# EAGLE board Analog_Master (EAGLE 7.4.0)
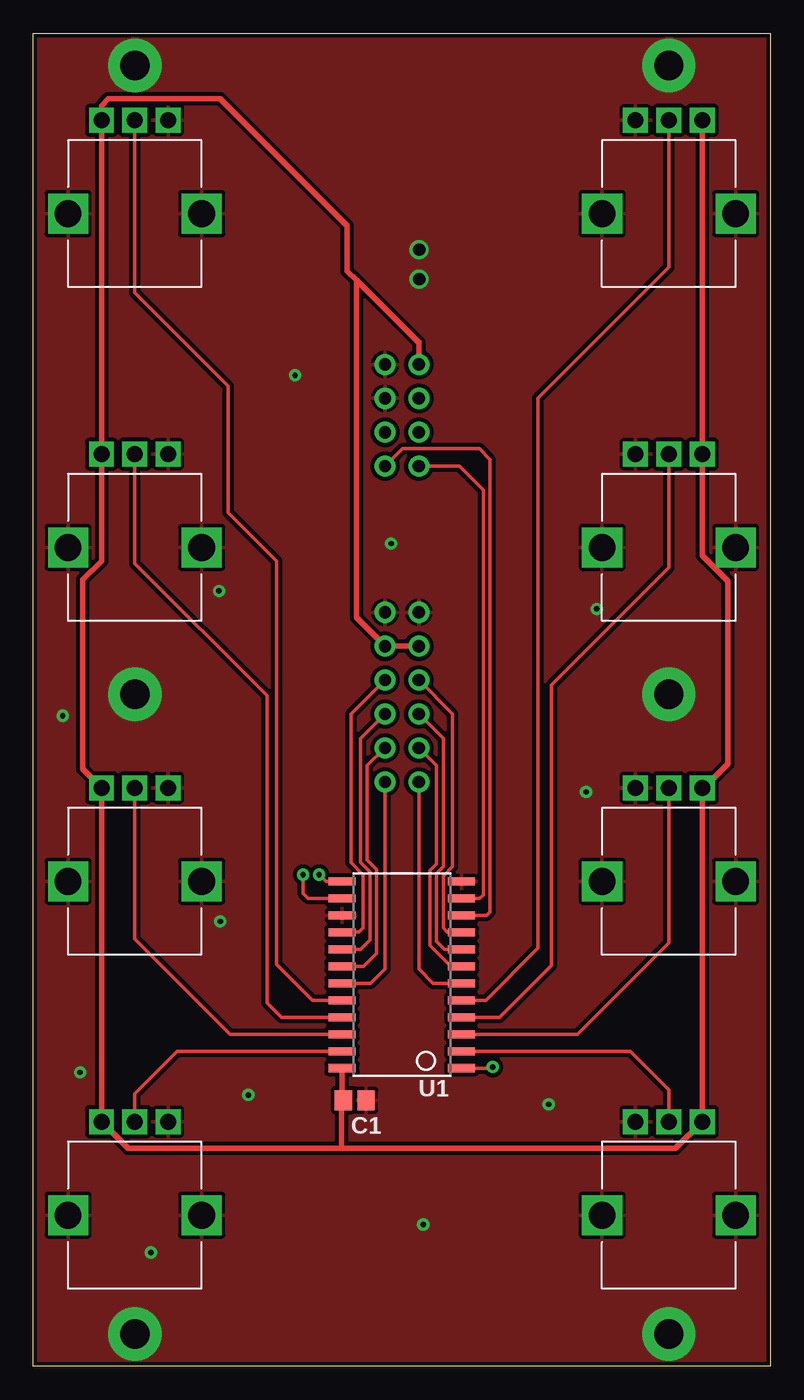
[diagram p0: board, top side]
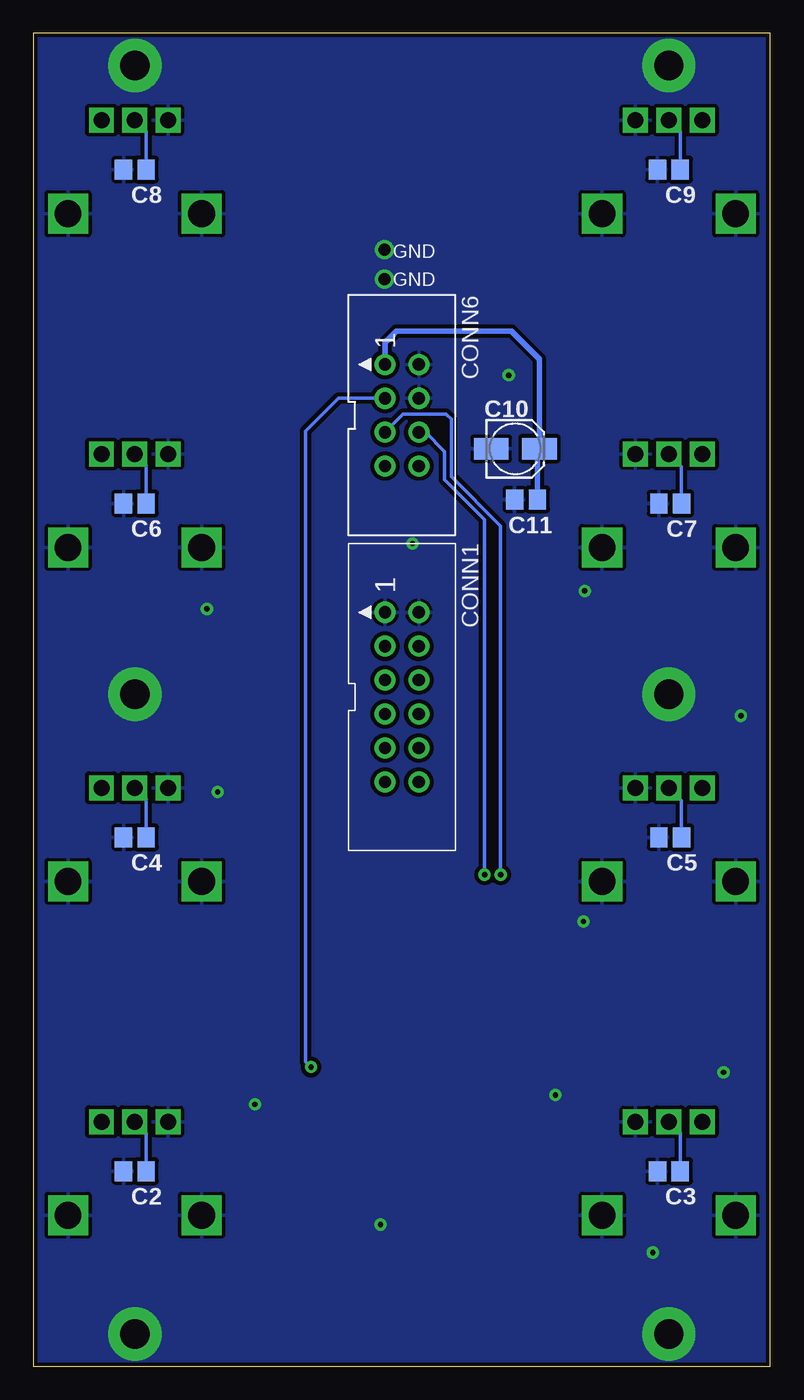
[diagram p1: board, bottom side, seen from below]

Size 55.2 x 99.8 mm. Coordinates in mm from the lower left corner, seen from the top.
Outline: 55.2,0 0,0 0,99.8 55.2,99.8 55.2,0
Copper layers (1*16): Top 0.035mm / dielectric 1.5mm / Bottom 0.035mm
Design rules "smiery": minimum track width 10mil, minimum drill 12mil, track to track 7mil, track to pad 5mil, pad to pad 5mil, via to via 6mil, smd to smd 0mil, copper to edge 12mil, drill to drill 10mil, minimum pad ring 13mil, minimum via ring 10mil, stop-mask expansion 2mil, vias tented up to drill 25mil, thermal gap 10mil

## Footprints (pad centres in the part's own frame; a part is rotated, then mirrored left to right if it is on the bottom)
C0805 = smd 1.3 x 1.5: 1 -0.85,0; 2 0.85,0
153CLV-0405 = smd 2.6 x 1.6: + 1.8,0; - -1.8,0
IDC-12P-2.54 = drill 0.914: 1 -6.35,-1.27; 2 -6.35,1.27; 3 -3.81,-1.27; 4 -3.81,1.27; 5 -1.27,-1.27; 6 -1.27,1.27; 7 1.27,-1.27; 8 1.27,1.27; 9 3.81,-1.27; 10 3.81,1.27; 11 6.35,-1.27; 12 6.35,1.27
IDC-08P-2.54 = drill 0.914: 1 -3.81,-1.27; 2 -3.81,1.27; 3 -1.27,-1.27; 4 -1.27,1.27; 5 1.27,-1.27; 6 1.27,1.27; 7 3.81,-1.27; 8 3.81,1.27
PTV09A-4025F-B103 = drill 1.2 square: 1 -2.5,-7; 2 0,-7; 3 2.5,-7 | drill 2 square: S1 -5,0; S2 5,0
SO24-W = smd 2.032 x 0.6: 1 -4.475,6.985; 2 -4.475,5.715; 3 -4.475,4.445; 4 -4.475,3.175; 5 -4.475,1.905; 6 -4.475,0.635; 7 -4.475,-0.635; 8 -4.475,-1.905; 9 -4.475,-3.175; 10 -4.475,-4.445; 11 -4.475,-5.715; 12 -4.475,-6.985; 13 4.475,-6.985; 14 4.475,-5.715; 15 4.475,-4.445; 16 4.475,-3.175; 17 4.475,-1.905; 18 4.475,-0.635; 19 4.475,0.635; 20 4.475,1.905; 21 4.475,3.175; 22 4.475,4.445; 23 4.475,5.715; 24 4.475,6.985

## Placement (x,y rotation side)
C1  100n  [C0805]  24.07,19.91 180 top
C2  100n  [C0805]  47.6,14.6 180 bottom
C3  100n  [C0805]  7.6,14.6 180 bottom
C4  100n  [C0805]  47.6,39.6 180 bottom
C5  100n  [C0805]  7.5,39.6 180 bottom
C6  100n  [C0805]  47.6,64.6 180 bottom
C7  100n  [C0805]  7.5,64.6 180 bottom
C8  100n  [C0805]  47.6,89.6 180 bottom
C9  100n  [C0805]  7.6,89.6 180 bottom
C10  10u  [153CLV-0405]  19.1,68.7 0 bottom
C11  100n  [C0805]  18.3,64.9 180 bottom
CONN1  PINHD-2X06-IDC-2.54-V  [IDC-12P-2.54]  27.6,50.1 270 bottom
CONN6  PINHD-2X04-IDC-2.54-V  [IDC-08P-2.54]  27.6,71.2 270 bottom
R3  10k  [PTV09A-4025F-B103]  47.6,11.3 180 top
R4  10k  [PTV09A-4025F-B103]  7.6,11.3 180 top
R5  10k  [PTV09A-4025F-B103]  47.6,36.3 180 top
R6  10k  [PTV09A-4025F-B103]  7.6,36.3 180 top
R7  10k  [PTV09A-4025F-B103]  47.6,61.3 180 top
R8  10k  [PTV09A-4025F-B103]  7.6,61.3 180 top
R9  10k  [PTV09A-4025F-B103]  47.6,86.3 180 top
R10  10k  [PTV09A-4025F-B103]  7.6,86.3 180 top
U1  MC14067BDWR2G-SO24W  [SO24-W]  27.6,29.3 180 top

## Library data of the parts
C1-C9 C11 CONN1 CONN6 R3-R10 = igor_lbr
C10 = igor_lbr; MANUFACTURER: Multicomp; MPN: MCVVT016M100CA1L
U1 = igor_lbr; MANUFACTURER: ON Semiconductor; MPN: MC14067BDWR2G

## Nets
+3V3: C1.2 C10.+ C11.1 CONN1.3 CONN1.4 CONN6.1 R3.1 R4.3 R5.1 R6.3 R7.1 R8.3 R9.1 R10.3 U1.24
AS_1: C2.1 R3.2 U1.2
AS_2: C3.1 R4.2 U1.23
AS_3: C4.1 R5.2 U1.3
AS_4: C5.1 R6.2 U1.22
AS_5: C6.1 R7.2 U1.4
AS_6: C7.1 R8.2 U1.21
AS_7: C8.1 R9.2 U1.5
AS_8: C9.1 R10.2 U1.20
AS_9: CONN1.5 U1.9
AS_10: CONN1.7 U1.8
AS_11: CONN1.9 U1.7
AS_12: CONN1.11 U1.6
AS_13: CONN1.6 U1.16
AS_14: CONN1.8 U1.17
AS_15: CONN1.10 U1.18
AS_16: CONN1.12 U1.19
GND: C1.1 C2.2 C3.2 C4.2 C5.2 C6.2 C7.2 C8.2 C9.2 C10.- C11.2 CONN1.1 CONN1.2 CONN6.2 CONN6.4 R3.3 R3.S1 R3.S2 R4.1 R4.S1 R4.S2 R5.3 R5.S1 R5.S2 R6.1 R6.S1 R6.S2 R7.3 R7.S1 R7.S2 R8.1 R8.S1 R8.S2 R9.3 R9.S1 R9.S2 R10.1 R10.S1 R10.S2 U1.12 U1.15
MUX_OUT: CONN6.3 U1.1
MUX_S0: CONN6.8 U1.10
MUX_S1: CONN6.7 U1.11
MUX_S2: CONN6.5 U1.14
MUX_S3: CONN6.6 U1.13

## Tracks (layer width: path | path; a pad name or v marks a point on that pad's centre or on a via)
+3V3
  Top 0.406: U1.24 23.12,20 | 23.12,20 C1.2 | R9.1 R7.1 50.1,60.7 52,58.8 52,45.1 50.2,43.3 R5.1 R3.1 48.1,16.3 23.1,16.3 | 23.1,16.3 7.1,16.3 R4.3 R6.3 3.7,44.7 3.7,58.9 5.1,60.3 R8.3 R10.3 5.1,94.4 5.6,94.9 14,94.9 23.5,85.4 23.5,82 24.19,81.31 | 23.12,20 23.1,20 23.1,16.3 | CONN1.3 CONN1.4 24.19,56.05 24.19,81.31 | CONN6.1 28.87,76.63 24.19,81.31
  Bottom 0.406: CONN6.1 28.87,76.63 28,77.5 19.4,77.5 17.3,75.4 C10.+ 17.45,68.55 C11.1
AS_1
  Top 0.254: U1.2 44.72,23.59 47.6,20.7 R3.2
  Bottom 0.254: C2.1 46.75,17.45 R3.2
AS_2
  Top 0.254: U1.23 10.79,23.59 7.6,20.4 R4.2
  Bottom 0.254: C3.1 6.75,17.45 R4.2
AS_3
  Top 0.254: U1.3 40.76,24.86 47.6,31.7 R5.2
  Bottom 0.254: C4.1 46.75,42.45 R5.2
AS_4
  Top 0.254: R6.2 7.6,32 14.74,24.86 U1.22
  Bottom 0.254: C5.1 6.65,42.35 R6.2
AS_5
  Top 0.254: R7.2 47.6,59.8 38.8,51 38.8,30 34.92,26.12 U1.4
  Bottom 0.254: C6.1 46.75,67.45 R7.2
AS_6
  Top 0.254: R8.2 7.6,60.1 17.5,50.2 17.5,27.2 18.57,26.12 U1.21
  Bottom 0.254: C7.1 6.65,67.35 R8.2
AS_7
  Top 0.254: R9.2 47.6,82.3 37.8,72.5 37.8,31.3 33.9,27.39 U1.5
  Bottom 0.254: C8.1 46.75,92.45 R9.2
AS_8
  Top 0.254: U1.20 20.9,27.4 18.2,30.1 18.2,60.3 14.6,63.9 14.6,73.4 7.6,80.4 R10.2
  Bottom 0.254: C9.1 6.75,92.45 R10.2
AS_9
  Top 0.254: U1.9 31.02,32.48 30.7,32.8 30.7,36.7 31.4,37.4 31.4,48.84 CONN1.5
AS_10
  Top 0.254: U1.8 30.8,31.2 30.2,31.8 30.2,36.9 30.7,37.4 30.7,47 CONN1.7
AS_11
  Top 0.254: U1.7 31.27,29.93 29.7,31.5 29.7,37.1 30.2,37.6 30.2,44.96 CONN1.9
AS_12
  Top 0.254: CONN1.11 28.87,29.73 29.93,28.66 U1.6
AS_13
  Top 0.254: U1.16 23.15,32.5 24.4,32.5 24.7,32.8 24.7,36.8 23.8,37.7 23.8,48.84 CONN1.6
AS_14
  Top 0.254: U1.17 24.5,31.2 25.2,31.9 25.2,37 24.5,37.7 24.5,47 CONN1.8
AS_15
  Top 0.254: U1.18 24.73,29.93 25.7,30.9 25.7,37.2 25,37.9 25,44.96 CONN1.10
AS_16
  Top 0.254: CONN1.12 26.33,29.73 25.27,28.66 U1.19
GND  (via drill 0.4 pad 0.6, 0.91, 2.2 pad 4)
  other vias: 19.6,74.2 41.4,43 42.2,56.7 26.8,61.6 13.9,58.05 38.6,19.6 2.2,48.7 14,33.3 29.2,10.6 16.1,20.3 3.5,22 8.8,8.5 28.9,81.4 28.9,83.6 47.6,2.4 7.6,2.4 47.6,50.3 7.6,50.3 7.6,97.4 47.6,97.4
  pour Bottom (isolate 0.305): 55.2,0 0,0 0,99.8 55.2,99.8
  pour Top (isolate 0.305): 55.2,0 0,0 0,99.8 55.2,99.8
MUX_OUT  (via drill 0.4 pad 0.6)
  Top 0.254: U1.1 34.31,22.32 v34.4,22.4
  Bottom 0.254: CONN6.3 32.33,72.47 34.8,70 34.8,22.8 v34.4,22.4
MUX_S0
  Top 0.254: U1.10 33.95,33.74 34.2,34 34.2,67.9 33.4,68.7 27.64,68.7 CONN6.8
MUX_S1
  Top 0.254: U1.11 33.41,35.02 33.7,35.3 33.7,65.6 31.91,67.39 CONN6.7
MUX_S2  (via drill 0.4 pad 0.6)
  Top 0.254: U1.14 20.59,35.02 20.2,35.4 v20.2,36.8
  Bottom 0.254: v20.2,36.8 20.2,62.9 23.9,66.6 23.9,70.9 24.3,71.3 27.5,71.3 CONN6.5
MUX_S3  (via drill 0.4 pad 0.6)
  Top 0.254: U1.13 21.91,36.28 v21.4,36.8
  Bottom 0.254: v21.4,36.8 21.4,63.4 24.4,66.4 24.4,68.5 25.83,69.93 CONN6.6

## Text on the board
bPlace: GND | GND